# Altium PCB NUC972 DEV BOARD-2 20150128.PcbDoc (part 2 of 5)
Units mil, origin at the board's own origin, x right, y up, seen from the top; angles counter-clockwise.
Board outline 10236.22 x 7677.17 mil, 4 copper layers (Top, 2-GND, 3-POWER, Bottom), stack 35.4 mil thick; 572 components, 593 nets, 2369 pads, 1783 vias.
Unrouted connection lines stored in the file: 1277.
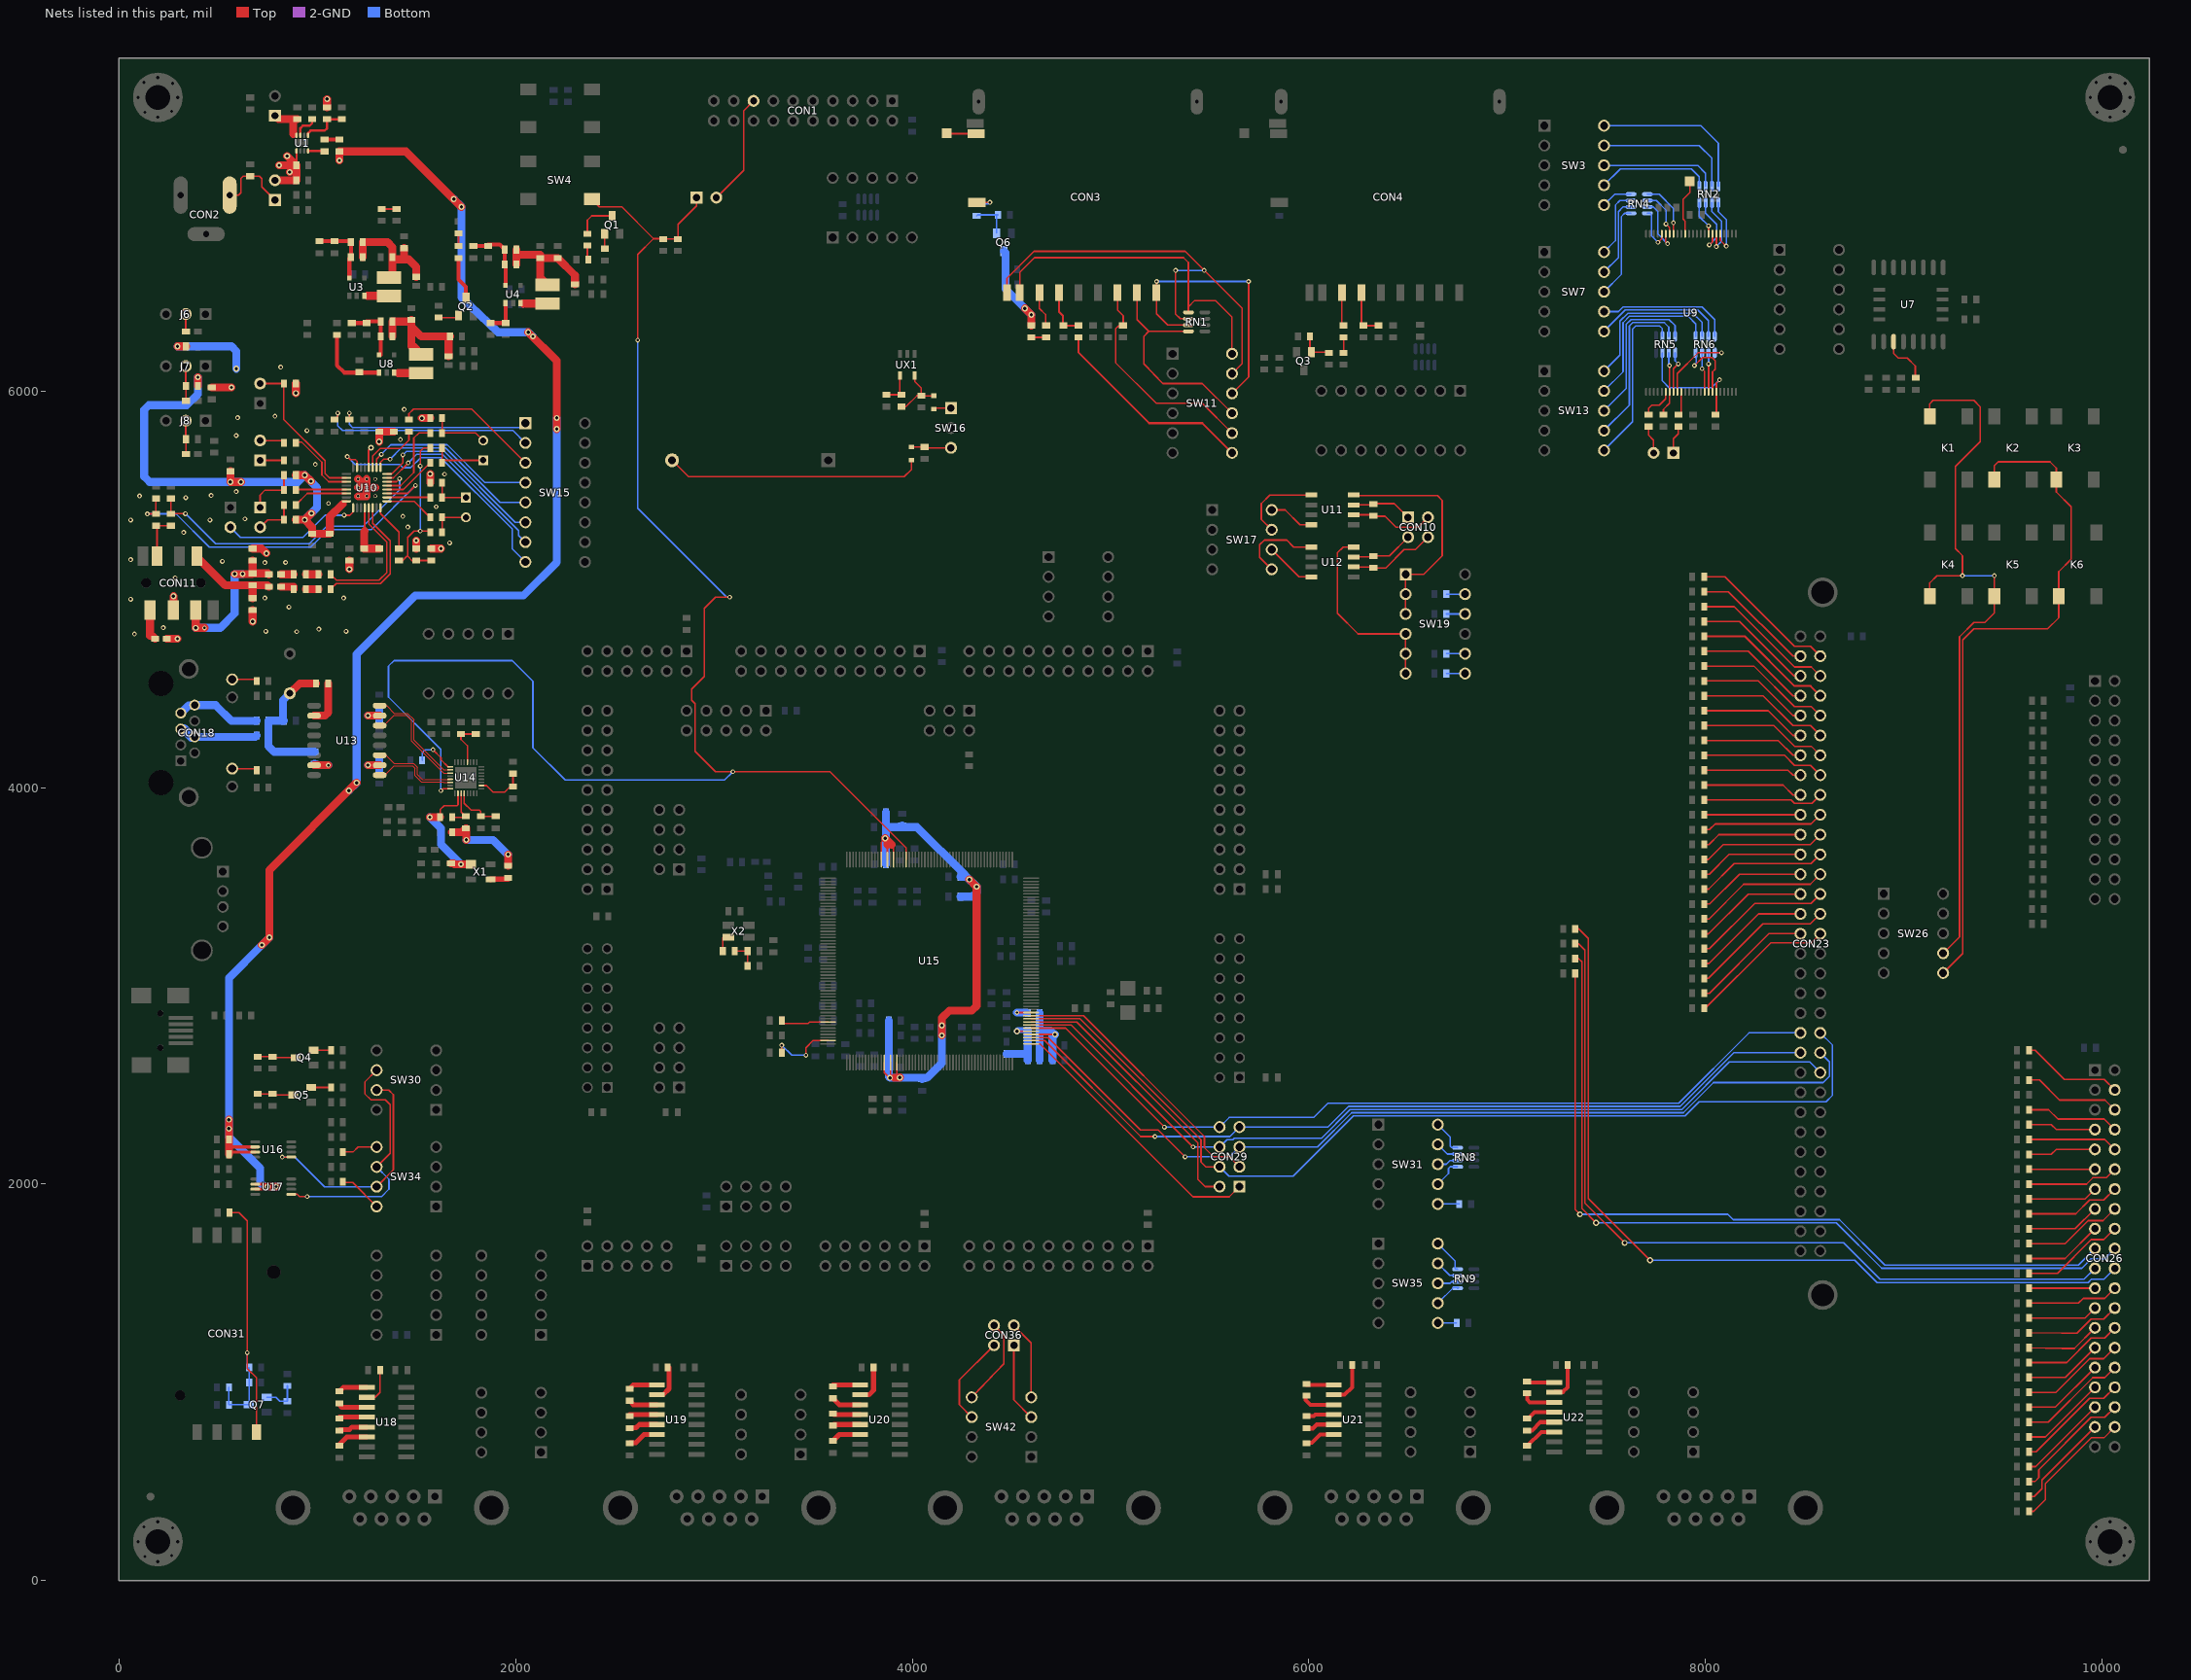
[diagram p4: the nets of this part, all layers, seen from the top]

## Via types
v1: diameter 24, hole 12, Top to Bottom, 1202 vias
v2: diameter 30, hole 16, Top to Bottom, 581 vias

## Nets (pads, with @x,y where several pads share a name; then routed paths per layer and width w, separated by ;. In a path a pad name is that pad's centre, name@x,y a point inside that pad or via, vN(x,y) a via of type N, cw(c..) or ccw(c..) an arc to the next point about the centre after c; other vN are vias at no path point)
5VIN: CT2.2 CT43.2 CT44.2 J3.2 R2.1 R5.2 R6.2 U1.1 U16.2 U16.3 U17.2 U17.3 | length 8518.7
  Top w10: CT2.2@895,7137.5 895.47,7137.97 U1.1@895.47,7210.63
  Top w15: CT44.2@555,2156.42 560.4,2161.82 U16.3@687.5,2161.82 ; 555,2180.85 561.56,2187.41 U16.2@687.5,2187.41 ; U17.3@687.5,1974.32 736.32,1974.32 v2(750,1988) 738.09,1999.91 U17.2@687.5,1999.91
  Top w40: CT44.2@555,2150.5 555,2156.42 555,2180.85 CT43.2@555,2225.5 v2(555,2280) v2(555,2325) ; v2(721,3206) v2(759,3244) 759,3584 v2(1199,4024) ; v2(750,1988) v2(793,1988) ; J3.2@787.5,7062.5 R6.2@895,7062.5 CT2.2@895,7137.5 ; v2(808,7137.5) CT2.2@895,7137.5 ; v2(848.5,7184) CT2.2@895,7137.5 ; v2(861.5,7104) CT2.2@895,7137.5 ; R2.1@1050,7430 v2(1050,7472) ; v2(1112.5,7162.5) R5.2@1112.5,7207.5 1448.5,7207.5 v2(1728,6928) ; v2(2064,6296) 2208,6152 v2(2208,5864) v2(2208,5808)
  Bottom w40: v2(759,3244) v2(721,3206) 555,3040 v2(555,2325) v2(555,2280) 555,2237 712,2080 712,2008 732,1988 v2(750,1988) v2(793,1988) ; v2(1160,3984) 1199,4023 v2(1199,4024) 1199,4672 1495,4968 2040,4968 2208,5136 v2(2208,5808) v2(2208,5864) ; v2(1689.11,6967.38) 1728,6928.5 v2(1728,6928) 1728,6472 1912,6296 v2(2064,6296) v2(2087.5,6275)
50MCLKI: C29.1 R72.2 U14.10 | length 275.5
  Top w8: U14.10@1828.24,4010.13 1853.87,4010.13 1888,3976 1944,3976 1973,4005 C29.1@1987.5,4005 ; C29.1@1987.5,4005 1987.5,4010.13 1999.5,4010.13 C29.1@1987.5,4005
  Top w10: C29.1@1987.5,4010.13 R72.2@1987.5,4070
ADC0: CON29.1 U15.55 | length 1391.7
  Top w8: U15.55@4599.31,2707.68 4644.32,2707.68 5416,1936 5598.5,1936 CON29.1@5650,1987.5
ADC1: CON29.2 U15.62 | length 1402.4
  Top w8: U15.62@4599.31,2817.91 4830.09,2817.91 5440,2208 5440,2024 5476.5,1987.5 CON29.2@5550,1987.5
ADC2: CON29.3 U15.64 | length 1399.1
  Top w8: U15.64@4599.31,2849.41 4864,2849.41 5473.41,2240 5473.41,2184 5519.91,2137.5 5600,2137.5 CON29.3@5650,2087.5
ADC3: CON23.42 CON29.4 U15.63 | length 4944.3
  Top w8: U15.63@4599.31,2833.66 4846.34,2833.66 5456,2224 5456,2112 5480.5,2087.5 CON29.4@5550,2087.5
  Bottom w8: CON29.4@5550,2087.5 5597.5,2040 5920,2040 6224,2344 7896,2344 7968,2416 8608,2416 8640,2448 8640,2700.75 CON23.42@8578.15,2762.6
ADC4: CON23.44 CON29.5 U15.57 | length 4579.9
  Top w8: U15.57@4599.31,2739.17 4684.83,2739.17 5150.42,2273.58 5239.92,2273.58 v1(5376,2137.5)
  Bottom w8: v1(5376,2137.5) 5600,2137.5 CON29.5@5650,2187.5 6043.5,2187.5 6216,2360 7888,2360 8040,2512 8592,2512 8624,2544 8624,2616.75 CON23.44@8578.15,2662.6
ADC5: CON23.46 CON29.6 U15.61 | length 4433.1
  Top w8: U15.61@4599.31,2802.17 4801.33,2802.17 v1(5416,2187.5)
  Bottom w8: v1(5416,2187.5) CON29.6@5550,2187.5 5586.5,2224 5616,2224 5624,2232 6064,2232 6208,2376 7880,2376 8120,2616 8524.75,2616 CON23.46@8578.15,2562.6
ADC6: CON23.43 CON29.7 U15.56 | length 4254.1
  Top w8: U15.56@4599.31,2723.43 4668.57,2723.43 5152,2240 v1(5224,2240)
  Bottom w8: v1(5224,2240) 5602.5,2240 CON29.7@5650,2287.5 6096,2287.5 6200.5,2392 7872,2392 8142.6,2662.6 CON23.43@8478.15,2662.6
ADC7: CON23.41 CON29.8 U15.60 | length 4282.3
  Top w8: U15.60@4599.31,2786.42 4773.08,2786.42 v1(5272,2287.5)
  Bottom w8: v1(5272,2287.5) CON29.8@5550,2287.5 5598.5,2336 6024,2336 6096,2408 7864,2408 8218.6,2762.6 CON23.41@8478.15,2762.6
ADCO: SW15.4 U10.10 | length 900.7
  Top w8: U10.10@1299.21,5614.86 1299.21,5656 v1(1323.21,5680)
  Bottom w8: v1(1323.21,5680) 1371.21,5728 1656,5728 1846.5,5537.5 SW15.4@2050,5537.5
ADD0: CON26.11 RB13.2 | length 332.5
  Top w8: RB13.2@9630,2075 CON26.11@9962.5,2075
ADD1: CON26.12 RB14.2 | length 463.6
  Top w8: RB14.2@9630,2000 9920,2000 9952,2032 10019.5,2032 CON26.12@10062.5,2075
ADD2: CON26.13 RB15.2 | length 353.2
  Top w8: RB15.2@9630,1925 9912.5,1925 CON26.13@9962.5,1975
ADD3: CON26.14 RB16.2 | length 484.3
  Top w8: RB16.2@9630,1850 9866,1850 9936,1920 10007.5,1920 CON26.14@10062.5,1975
ADD4: CON26.15 RB17.2 | length 373.9
  Top w8: RB17.2@9630,1775 9862.5,1775 CON26.15@9962.5,1875
ADD5: CON26.16 RB18.2 | length 505
  Top w8: RB18.2@9630,1700 9812,1700 9928,1816 10003.5,1816 CON26.16@10062.5,1875
ADD6: CON26.17 RB19.2 | length 394.6
  Top w8: RB19.2@9630,1625 9812.5,1625 CON26.17@9962.5,1775
ADD7: CON26.18 RB20.2 | length 525.7
  Top w8: RB20.2@9630,1550 9774,1550 9944,1720 10007.5,1720 CON26.18@10062.5,1775
ADD8: CON26.19 RB1.2 | length 3960.9
  Top w8: RB1.2@7342.5,3062.5 7342.5,1872 v2(7366.5,1848)
  Bottom w8: v2(7366.5,1848) 8112,1848 8139,1821 8675,1821 8904,1592 9879.5,1592 CON26.19@9962.5,1675
ADD9: CON26.20 RB2.2 | length 4136.8
  Top w8: RB2.2@7342.5,3137.5 7360,3137.5 7376,3121.5 7376,1877 v2(7448,1805)
  Bottom w8: v2(7448,1805) 8659,1805 8888,1576 9896,1576 9944,1624 10011.5,1624 CON26.20@10062.5,1675
AUXO1: C18.2 U10.21 | length 257.8
  Top w8: C18.2@892.5,5500 892.5,5502.66 U10.21@1147.64,5502.66
AUXO2: C20.2 U10.22 | length 279.1
  Top w8: C20.2@892.5,5425 950.47,5482.97 U10.22@1147.64,5482.97
AVD33: CB29.1 CB31.2 CT90.2 L14.2 U15.59 | length 385.9
  Top w8: v2(4528,2770.67) U15.59@4599.31,2770.67
  Bottom w30: v2(4528,2770.67) 4533.33,2776 4581.5,2776 CB29.1@4582.5,2775
  Bottom w40: L14.2@4475,2657.5 4582.5,2657.5 ; CB31.2@4582.5,2625 4582.5,2657.5 ; CB29.1@4582.5,2775 CT90.2@4582.5,2700 4582.5,2657.5
AVS: C67.1 CB29.2 CB31.1 CT90.1 RG2.2 RG3.2 U15.58 | length 578
  Top w8: U15.58@4599.31,2754.92 v2(4720,2754.92)
  Bottom w40: CB31.1@4642.5,2625 CT90.1@4642.5,2700 CB29.2@4642.5,2775 ; C67.1@4642.5,2862.5 CB29.2@4642.5,2775 ; RG3.2@4707.5,2625 RG2.2@4707.5,2700 4707.5,2742.42 v2@4718.04,2752.96 ; v2(4720,2754.92) v2@4718.04,2752.96 ; CB29.2@4642.5,2775 4696,2775 v2@4718.04,2752.96
BCLK: SW15.6 U10.8 | length 916.8
  Top w8: U10.8@1352.36,5581.4 1376,5581.4 1432,5637.4 v1(1432,5677)
  Bottom w8: v1(1432,5677) 1451,5696 1640,5696 1998.5,5337.5 SW15.6@2050,5337.5
BLEN: CON23.4 RL18.2 | length 751.3
  Top w8: RL18.2@7992.5,5062.5 8097.5,5062.5 8448,4712 8528.75,4712 CON23.4@8578.15,4662.6
CAN0H: CON10.1 R54.1 U11.7 | length 309.5
  Top w8: U11.7@6225.1,5425 6325,5425 R54.1@6325,5430 6327,5432 6430.5,5432 CON10.1@6500,5362.5
CAN0L: CON10.2 R54.2 U11.6 | length 436.3
  Top w8: U11.6@6225.1,5375 6323.24,5375 6323.24,5363.36 6323.34,5363.36 R54.2@6325,5370 6327,5368 6384,5368 6439.5,5312.5 6550,5312.5 CON10.2@6600,5362.5
CAN0RS: SW19.1 SW19.2 SW19.3 U11.8 | length 1161.1
  Top w8: U11.8@6225.1,5475 6228.1,5472 6648,5472 6672,5448 6672,5168 6579,5075 SW19.1@6487.5,5075 SW19.2@6487.5,4975 SW19.3@6487.5,4875
CAN0RX: SW17.8 U11.4 | length 231.1
  Top w8: SW17.8@5812.5,5400 5880,5400 5955,5325 U11.4@6012.5,5325
CAN0TX: SW17.7 U11.1 | length 424.1
  Top w8: SW17.7@5812.5,5300 5760,5352.5 5760,5432 5803,5475 U11.1@6012.5,5475
CAN1H: CON10.3 R59.1 U12.7 | length 319.3
  Top w8: U12.7@6225.1,5162.5 6325,5162.5 R59.1@6325,5167.5 6325.5,5168 6405.5,5168 CON10.3@6500,5262.5
CAN1L: CON10.4 R59.2 U12.6 | length 444.1
  Top w8: U12.6@6225.1,5112.5 6325,5112.5 R59.2@6325,5107.5 6387.5,5107.5 6480,5200 6537.5,5200 CON10.4@6600,5262.5
CAN1RS: SW19.4 SW19.5 SW19.6 U12.8 | length 984.5
  Top w8: U12.8@6225.1,5212.5 6172.5,5212.5 6144,5184 6144,4879 6248,4775 SW19.4@6487.5,4775 SW19.5@6487.5,4675 SW19.6@6487.5,4575
CAN1RX: SW17.6 U12.4 | length 257
  Top w8: SW17.6@5812.5,5200 5950,5062.5 U12.4@6012.5,5062.5
CAN1TX: SW17.5 U12.1 | length 434.2
  Top w8: SW17.5@5812.5,5100 5752,5160.5 5752,5224 5776,5248 5888,5248 5923.5,5212.5 U12.1@6012.5,5212.5
CDAVS: CT21.1 CT25.1 CT26.1 CT27.1 R47.1 R53.1 U10.24 | length 2552.5
  Top w10: 1128,5429 1128,5443.6 U10.24@1147.64,5443.6
  Top w40: CT21.1@398.75,6025 v2(398.75,6068.75) ; CT25.1@562.5,5595 v2(562.5,5541) v2(616,5541) ; R53.1@892.5,5350 v2(937.5,5350) ; R47.1@892.5,5575 v2(937.5,5575) 938,5575 v2(969,5544) ; v2(971,5383) 938,5350 v2(937.5,5350) ; 1128,5429 1064,5365 1064,5281.5 CT27.1@1062.5,5280 CT26.1@975,5280 975,5312.5 v2(937.5,5350)
  Bottom w40: v2(398.75,6068.75) 398.75,5984 342.75,5928 152,5928 128,5904 128,5568 155,5541 v2(562.5,5541) v2(616,5541) 904,5541 v2(937.5,5575) 1000,5512.5 1000,5412.5 v2(937.5,5350)
CDCAVS: R56.1 R57.1 U10.28 | length 281.2
  Top w10: 1240.16,5293 U10.28@1240.16,5410.14
  Top w40: 1240.16,5293 1237.5,5290.34 R56.1@1237.5,5205 R57.1@1312.5,5205
CDCVS: C22.1 C23.1 C27.1 CB8.1 CON11.2 CT16.1 CT22.1 CT28.1 L10.1 R33.1 R36.1 R43.1 R44.1 R48.2 U10.12 U10.33 U10.34 U10.35 U10.36 U10.37 U10.38 U10.39 U10.40 U10.41 | length 1658.2
  Top w10: U10.12@1259.84,5614.86 1259.84,5701 v2(1272,5713.16)
  Top w40: L10.1@242.5,4750 v2(296,4750) ; CON11.2@275.59,4895.37 v2(275.59,4965) ; v2(296,6225) CT16.1@338.75,6225 ; CT22.1@468.75,6017.5 v2(568,6017.5) ; v2(675,4837) C27.1@675,4895 ; C22.1@675,5205 720,5205 v2(744,5181) ; v2(892.5,5989) R33.1@892.5,6037.5 ; v2(1162.5,5101) C23.1@1162.5,5145 ; U10.35@1206.69,5469.19 U10.34@1250,5469.19 U10.37@1250,5512.5 ; U10.36@1206.69,5512.5 U10.37@1250,5512.5 ; U10.41@1206.69,5555.81 U10.37@1250,5512.5 ; U10.40@1250,5555.81 U10.37@1250,5512.5 ; U10.38@1293.31,5512.5 U10.37@1250,5512.5 ; v2(1312.5,5744) R43.1@1312.5,5795 R44.1@1387.5,5795 ; CB8.1@1500,5205 v2(1500,5245) ; v2(1528,5862.5) R36.1@1570,5862.5 ; R48.2@1570,5537.5 v2(1570,5581) ; CT28.1@1575,5205 v2(1624,5205)
  2-GND w20: U10.34@1250,5469.19 U10.37@1250,5512.5 U10.40@1250,5555.81
  Bottom w40: v2(296,6225) 568,6225 593,6200 v2(593,6112)
  other v1: 79.16,4774.43 897.2,4785.79 1145.69,4787.39 741.74,4787.7 1008.74,4799.06 224.02,4805.67 858.2,4909.84 59.76,4948.95 1133.71,4955.28 736.82,4955.65 284.43,5057.54 736.82,5134.75 840.39,5135.16 522.26,5140.84 59.76,5148.95 1667.71,5233.64 326.92,5286.17 1457.52,5313.17 59.76,5348.95 459.76,5348.95 635.96,5354.53 1431.96,5367.14 1600,5416 1057,5432.89 337.64,5461.8 104.73,5470.32 465.46,5473.16 591.62,5492.66 1642.15,5580.17 990.92,5629.92 1420,5755 592.05,5774.82 948.45,5800.15 599.28,5865.28 787.44,5872.52 1438.74,5906.78 816.38,6120.37
COL: R76.1 R77.2 U14.4 | length 250.1
  Top w8: U14.4@1741.63,3970.76 1741.63,3920 1776.13,3885.5 1818.5,3885.5 1824,3880 1824,3856 R76.1@1825,3855 R77.2@1900,3855
COL0: K1.2 K4.1 K5.1 SW26.7 | length 3705.2
  Top w8: K4.1@9130.31,4965.16 9130.31,5032 9166.31,5068 v1(9295,5068) 9295,5169 9259,5205 9259,5619 9384,5744 9384,5920 9352,5952 9146.31,5952 9130.31,5936 K1.2@9130.31,5872.34 ; SW26.7@9197.64,3164.57 9280,3246.93 9280,4760 9352,4832 9407.31,4832 9455.31,4880 K5.1@9455.31,4965.16 v1(9455.31,5068)
  Bottom w8: v1(9295,5068) v1(9455.31,5068)
COL1: K2.1 K3.1 K6.1 SW26.6 | length 3466.6
  Top w8: SW26.6@9197.64,3064.57 9296,3162.93 9296,4744 9352,4800 9724.31,4800 9780.31,4856 K6.1@9780.31,4965.16 9780.31,5088.42 9843,5151.1 9843,5415.32 9767.81,5490.5 K3.1@9767.81,5552.66 9767.81,5610.5 9735.81,5642.5 9475,5642.5 9455.31,5622.82 K2.1@9455.31,5552.66
CRS: R67.1 R68.2 U14.20 | length 230.2
  Top w8: U14.20@1757.37,4128.24 1757.37,4210.63 1725,4243 R67.1@1725,4270 R68.2@1800,4270
CSB: SW15.8 U10.15 | length 1308.1
  Top w8: v1(1152,5669) 1168,5653 1192.79,5653 1200.79,5645 U10.15@1200.79,5614.86
  Bottom w8: v1(1152,5669) 1192,5629 1416,5629 1432,5613 1472,5613 1523,5664 1624,5664 1984,5304 1984,5203.5 SW15.8@2050,5137.5
D0: CON26.23 RB21.2 | length 332.5
  Top w8: RB21.2@9630,1475 CON26.23@9962.5,1475
D1: CON26.24 RB22.2 | length 463.6
  Top w8: RB22.2@9630,1400 9880,1400 9904,1424 10011.5,1424 CON26.24@10062.5,1475
D2: CON26.25 RB23.2 | length 353.2
  Top w8: RB23.2@9630,1325 9912.5,1325 CON26.25@9962.5,1375
D3: CON26.26 RB24.2 | length 485.1
  Top w8: RB24.2@9630,1250 9794.5,1248 9872,1248 9944,1320 10007.5,1320 CON26.26@10062.5,1375
D4: CON26.27 RB25.2 | length 375.6
  Top w8: RB25.2@9630,1175 9796.5,1171 9858.5,1171 CON26.27@9962.5,1275
D5: CON26.28 RB26.2 | length 505
  Top w8: RB26.2@9630,1100 9820,1100 9944,1224 10011.5,1224 CON26.28@10062.5,1275
D6: CON26.29 RB27.2 | length 394.5
  Top w8: RB27.2@9630,1025 9631.79,1025.29 9812.79,1025.29 CON26.29@9962.5,1175
D7: CON26.30 RB28.2 | length 525.7
  Top w8: RB28.2@9630,950 9766,950 9936,1120 10007.5,1120 CON26.30@10062.5,1175
D8: CON26.31 RB29.2 | length 415.3
  Top w8: RB29.2@9630,875 9762.5,875 CON26.31@9962.5,1075
D9: CON26.32 RB30.2 | length 546.4
  Top w8: RB30.2@9630,800 9728,800 9952,1024 10011.5,1024 CON26.32@10062.5,1075
D10: CON26.33 RB31.2 | length 436.1
  Top w8: RB31.2@9630,725 9712.5,725 CON26.33@9962.5,975
D11: CON26.34 RB32.2 | length 567
  Top w8: RB32.2@9630,650 9631.58,650.52 9666.52,650.52 9936,920 10007.5,920 CON26.34@10062.5,975
D12: CON26.35 RB33.2 | length 456.6
  Top w8: RB33.2@9630,575 9632.15,575.8 9663.33,575.83 CON26.35@9962.5,875
D13: CON26.36 RB34.2 | length 611.3
  Top w8: RB34.2@9630,500 9660,500 9680,520 9680,560 9944,824 10011.5,824 CON26.36@10062.5,875
D14: CON26.37 RB35.2 | length 503.5
  Top w8: RB35.2@9630,425 9657,425 9696,464 9696,508.5 CON26.37@9962.5,775
D15: CON26.38 RB36.2 | length 655.7
  Top w8: RB36.2@9630,350 9654,350 9712,408 9712,488.5 9944,720.5 10008,720.5 CON26.38@10062.5,775
DAC0: R61.1 U10.30 | length 702.2
  Top w8: R61.1@1067.5,5000 1096.5,5029 1320,5029 1368,5077 1368,5244.53 1279.53,5333 U10.30@1279.53,5410.14
DAC1: R60.1 U10.29 | length 676.8
  Top w8: R60.1@1067.5,5075 1097.5,5045 1312,5045 1352,5085 1352,5237 1259.84,5329.16 U10.29@1259.84,5410.14
DACI: SW15.5 U10.9 | length 899.8
  Top w8: U10.9@1318.9,5614.86 1318.9,5640 1334.9,5656 v1(1368,5656)
  Bottom w8: v1(1368,5656) 1424,5712 1648,5712 1922.5,5437.5 SW15.5@2050,5437.5
EMCLK: R25.2 SW11.7 | length 1060.5
  Top w10: R25.2@4837.5,6270 4837.5,6194.5 5194.5,5837.5 5462.5,5837.5 SW11.7@5612.5,5687.5
EMCMD: CON3.2 R26.1 SW11.8 | length 1128.2
  Top w8: CON3.2@5034.74,6496.16 5034.74,6408 5064,6378.74 5064,6331.5 R26.1@5062.5,6330 5060.5,6328 5040,6328 5025,6313 5025,6143 5230.5,5937.5 5462.5,5937.5 SW11.8@5612.5,5787.5
EMD0: CON3.7 RN1.2 SW11.12 | length 1697.3
  Top w8: CON3.7@4542.62,6496.16 4542.62,6598.62 4616,6672 5368,6672 5392,6648 5392,6424 ; RN1.2@5393,6396 5392,6397 5392,6424 ; SW11.12@5612.5,6187.5 5612.5,6371.5 5528,6456 5424,6456 5392,6424
EMD1: CON3.8 RN1.4 SW11.11 | length 2222.6
  Top w8: CON3.8@4477.66,6496.16 4477.66,6568 4613.66,6704 5376,6704 v1(5472,6608) 5664,6416 5664,6139 SW11.11@5612.5,6087.5 ; v1(5328,6608) 5328,6388 5352,6364 RN1.4@5393,6364
  Bottom w8: v1(5328,6608) v1(5472,6608)
EMD2: CON3.9 RN1.6 SW11.10 | length 1411.6
  Top w8: v1(5232,6552) 5232,6496.57 CON3.9@5231.59,6496.16 5231.59,6388.41 5288,6332 RN1.6@5393,6332 ; SW11.10@5612.5,5987.5 5696,6071 v1(5696,6552)
  Bottom w8: v1(5232,6552) v1(5696,6552)
EMD3: CON3.1 RN1.8 SW11.9 | length 1143.5
  Top w8: CON3.1@5133.17,6496.16 5133.17,6359.5 5192.67,6300 ; RN1.8@5393,6300 5192.67,6300 ; SW11.9@5612.5,5887.5 5462.5,6037.5 5264,6037.5 5168,6136 5168,6275.33 5192.67,6300
EMVD33: CT55.2 Q6.D R24.1 R100.2 | length 476.9
  Top w40: v2(4568,6416) v2(4600,6384) R24.1@4600,6330
  Bottom w40: Q6.D@4462.5,6704.72 4470,6697.22 CT55.2@4470,6612.5 R100.2@4470,6537.5 4470,6514 v2(4568,6416) v2(4600,6384)
EMWP: CON3.11 PAD1.\ | length 148
  Top w8: PAD1.\@4175,7300 4177.66,7297.34 CON3.11@4321.95,7297.34
ETHX0: R74.1 R75.1 U14.3 | length 195.5
  Top w8: R74.1@1680,3850 1738,3850 R75.1@1745.44,3857.44 ; U14.3@1725.88,3970.76 1725.88,3877 R75.1@1745.44,3857.44 ; R75.1@1750,3855 1747.88,3855 R75.1@1745.44,3857.44
ETHX1: C31.1 R74.2 U14.2 X1.1 | length 654
  Top w8: R74.2@1620,3850 1620,3888 1639.81,3907.81 1705.44,3907.81 1710.13,3912.5 U14.2@1710.13,3970.76
  Top w40: v2(1568,3850) R74.2@1620,3850 ; C31.1@1674.5,3617 1687.5,3617 1692,3612.5 v2(1725,3612.5) X1.1@1775,3612.5
  Bottom w40: v2(1568,3850) 1569,3850 1625,3794 1625,3712.5 v2(1725,3612.5)
FS: SW15.7 U10.7 | length 944.3
  Top w8: U10.7@1352.36,5561.71 1384,5561.71 v1(1459.29,5637)
  Bottom w8: v1(1459.29,5637) 1502.29,5680 1632,5680 2016,5296 2016,5271.5 SW15.7@2050,5237.5
ICENRST: CON1.15 J4.2 | length 565.2
  Top w8: J4.2@3012.5,6975 3150,7112.5 3150,7412.5 CON1.15@3200,7462.5
LAUXI: C14.2 U10.19 | length 376.5
  Top w8: C14.2@892.5,5737.5 896,5741 923,5741 1024,5640 1024,5576 1057.97,5542.03 U10.19@1147.64,5542.03
LCLK: CON23.8 RL19.2 | length 709.9
  Top w10: RL19.2@7992.5,4762.5 8197.5,4762.5 8448,4512 8528.75,4512 CON23.8@8578.15,4462.6
LCS: CON23.3 RL17.2 | length 620.2
  Top w8: RL17.2@7992.5,4987.5 8115.1,4987.5 8440,4662.6 CON23.3@8478.15,4662.6
LD0: CON23.32 RL1.2 | length 741
  Top w8: RL1.2@7992.5,2887.5 7993,2888 8000,2888 8328,3216 8531.55,3216 CON23.32@8578.15,3262.6
LD1: CON23.31 RL2.2 | length 610
  Top w8: RL2.2@7992.5,2962.5 8018.5,2962.5 8318.6,3262.6 CON23.31@8478.15,3262.6
LD2: CON23.30 RL3.2 | length 720.3
  Top w8: RL3.2@7992.5,3037.5 8013.5,3037.5 8288.45,3312.45 8528,3312.45 CON23.30@8578.15,3362.6
LD3: CON23.29 RL4.2 | length 589.2
  Top w8: RL4.2@7992.5,3112.5 8016.5,3112.5 8266.6,3362.6 CON23.29@8478.15,3362.6
LD4: CON23.28 RL5.2 | length 699.6
  Top w8: RL5.2@7992.5,3187.5 8019.5,3187.5 8248,3416 8531.55,3416 CON23.28@8578.15,3462.6
LD5: CON23.27 RL6.2 | length 568.5
  Top w8: RL6.2@7992.5,3262.5 8014.5,3262.5 8214.6,3462.6 CON23.27@8478.15,3462.6
LD6: CON23.26 RL7.2 | length 678.9
  Top w8: RL7.2@7992.5,3337.5 8017.5,3337.5 8192,3512 8527.55,3512 CON23.26@8578.15,3562.6
LD7: CON23.25 RL8.2 | length 547.8
  Top w8: RL8.2@7992.5,3412.5 8020.5,3412.5 8170.6,3562.6 CON23.25@8478.15,3562.6
LD8: CON23.24 RL9.2 | length 658.2
  Top w8: RL9.2@7992.5,3487.5 8015.5,3487.5 8144,3616 8531.55,3616 CON23.24@8578.15,3662.6
LD9: CON23.23 RL10.2 | length 527.1
  Top w8: RL10.2@7992.5,3562.5 8018.5,3562.5 8118.6,3662.6 CON23.23@8478.15,3662.6
LD10: CON23.22 RL11.2 | length 637.5
  Top w8: RL11.2@7992.5,3637.5 8013.5,3637.5 8088.45,3712.45 8528,3712.45 CON23.22@8578.15,3762.6
LD11: CON23.21 RL12.2 | length 506.4
  Top w8: RL12.2@7992.5,3712.5 8016.5,3712.5 8066.6,3762.6 CON23.21@8478.15,3762.6
LD12: CON23.20 RL13.2 | length 616.8
  Top w8: RL13.2@7992.5,3787.5 8019.5,3787.5 8048,3816 8531.55,3816 CON23.20@8578.15,3862.6
LD13: CON23.19 RL14.2 | length 485.8
  Top w8: RL14.2@7992.5,3862.5 7992.5,3862.6 CON23.19@8478.15,3862.6
LD14: CON23.18 RL15.2 | length 610.5
  Top w8: RL15.2@7992.5,3937.5 8430.5,3937.5 8448,3920 8535.55,3920 CON23.18@8578.15,3962.6
LD15: CON23.17 RL16.2 | length 506.3
  Top w8: RL16.2@7992.5,4012.5 8390.1,4012.5 8440,3962.6 CON23.17@8478.15,3962.6
LD16: CON23.16 RL23.2 | length 627
  Top w8: RL23.2@7992.5,4162.5 8397.5,4162.5 8448,4112 8528.75,4112 CON23.16@8578.15,4062.6
LD17: CON23.15 RL24.2 | length 496
  Top w8: RL24.2@7992.5,4087.5 8415.1,4087.5 8440,4062.6 CON23.15@8478.15,4062.6
LD18: CON23.14 RL25.2 | length 647.7
  Top w8: RL25.2@7992.5,4312.5 7993,4312 8344,4312 8448,4208 8532.75,4208 CON23.14@8578.15,4162.6
LD19: CON23.13 RL26.2 | length 516.7
  Top w8: RL26.2@7992.5,4237.5 8365.1,4237.5 8440,4162.6 CON23.13@8478.15,4162.6
LD20: CON23.12 RL27.2 | length 668.5
  Top w8: RL27.2@7992.5,4462.5 8289.5,4462.5 8440,4312 8528.75,4312 CON23.12@8578.15,4262.6
LD21: CON23.11 RL28.2 | length 537.4
  Top w8: RL28.2@7992.5,4387.5 8315.1,4387.5 8440,4262.6 CON23.11@8478.15,4262.6
LD22: CON23.10 RL29.2 | length 689.2
  Top w8: RL29.2@7992.5,4612.5 8243.5,4612.5 8448,4408 8532.75,4408 CON23.10@8578.15,4362.6
LD23: CON23.9 RL30.2 | length 558.1
  Top w8: RL30.2@7992.5,4537.5 8265.1,4537.5 8440,4362.6 CON23.9@8478.15,4362.6
LDEN: CON23.5 RL22.2 | length 599.5
  Top w8: RL22.2@7992.5,4837.5 8170.5,4837.5 8445.4,4562.6 CON23.5@8478.15,4562.6
LHSYNC: CON23.7 RL20.2 | length 578.8
  Top w8: RL20.2@7992.5,4687.5 8215.1,4687.5 8440,4462.6 CON23.7@8478.15,4462.6
LIN0: R49.2 R51.2 U10.3 | length 1831.2
  Top w8: v1(144,5380) R51.2@187.5,5380 R49.2@187.5,5457.5 ; U10.3@1352.36,5482.97 1456,5482.97 v1(1496,5522.97)
  Bottom w8: v1(144,5380) 288,5380 288.5,5380.5 456,5213 968,5213 1056,5301 1274.03,5301 v1(1496,5522.97)
LIN1: R50.2 R52.2 U10.6 | length 1532.9
  Top w8: R50.2@262.5,5457.5 R52.2@262.5,5380 263.5,5381 v1(336,5381) ; U10.6@1352.36,5542.03 1401.03,5542.03 v1(1416,5557)
  Bottom w8: v1(336,5381) 488,5229 960,5229 1048,5317 1232,5317 1416,5501 v1(1416,5557)
LSPKOUT: CON8.2 U10.25 | length 714.1
  Top w8: v1(1136,5373) 1165.1,5373 1181.1,5389 U10.25@1181.1,5410.14
  Bottom w8: CON8.2@562.5,5312.5 614,5261 928,5261 1040,5373 v1(1136,5373)
LVSYNC: CON23.6 RL21.2 | length 730.6
  Top w8: RL21.2@7992.5,4912.5 7993,4912 8144,4912 8448,4608 8532.75,4608 CON23.6@8578.15,4562.6
MCLK: R45.2 U10.11 | length 316
  Top w8: U10.11@1279.53,5614.86 1279.53,5671.53 1318.5,5710.5 1421,5710.5 1462.5,5752 R45.2@1462.5,5795
MDI_RN: U13.8 U14.26 | length 549
  Top w4: U13.8@1315.5,4412.5 1350,4412.5 1387.5,4375 1454.47,4375 1487.5,4341.97 1487.5,4240.09 1638.72,4088.87 U14.26@1670.76,4088.87
MDI_RP: U13.6 U14.27 | length 555.9
  Top w4: U13.6@1315.5,4312.5 1337,4312.5 1387.5,4363 1449.5,4363 1475.5,4337 1475.5,4235.12 1637.5,4073.12 U14.27@1670.76,4073.12
MDI_TN: U13.3 U14.29 | length 428.8
  Top w4: U13.3@1315.5,4162.5 1346.47,4162.5 1387.5,4121.47 1487.02,4121.47 1506,4102.49 1506,4064.99 1531.23,4039.75 1635.63,4039.75 1637.5,4041.63 U14.29@1670.76,4041.63
MDI_TP: U13.1 U14.30 | length 431.3
  Top w4: U13.1@1315.5,4062.5 1340.53,4062.5 1387.5,4109.47 1482.05,4109.47 1494,4097.51 1494,4060.01 1526.26,4027.75 1635.63,4027.75 1637.5,4025.88 U14.30@1670.76,4025.88
MIC00: C19.1 U10.2 | length 218
  Top w8: U10.2@1352.36,5463.29 1569.21,5463.29 C19.1@1570,5462.5
MIC01: C21.1 U10.1 | length 251.2
  Top w8: U10.1@1352.36,5443.6 1488.9,5443.6 C21.1@1570,5362.5
MIC10: C15.1 U10.5 | length 429.4
  Top w8: U10.5@1352.36,5522.34 1421.34,5522.34 1487.5,5588.5 1487.5,5762.5 1512.5,5787.5 C15.1@1570,5787.5
MIC11: C17.1 U10.4 | length 273.5
  Top w8: U10.4@1352.36,5502.66 1435.16,5502.66 C17.1@1570,5637.5
MICBIAS: CB8.2 CT28.2 R46.2 R55.2 R58.2 | length 868
  Top w8: R58.2@1412.5,5145 1432.08,5145 1452.08,5165 1456,5165 ; v1(1520,5621) 1520,5696.5 1536,5712.5 R46.2@1570,5712.5 ; R55.2@1570,5287.5 1570,5293 v1(1520,5293) 1488,5293 1456,5261 1456,5165 ; CT28.2@1575,5145 CB8.2@1500,5145 1477.41,5145 1457.41,5165 1456,5165
  Bottom w8: v1(1520,5293) v1(1520,5621)
MODE: CON5.2 R33.2 U10.18 | length 776.7
  Top w8: CON5.2@712.5,6037.5 R33.2@832.5,6037.5 832,6037 832,5856 1040,5648 1040,5584 1062.29,5561.71 U10.18@1147.64,5561.71
MVS: CM1.2 CM2.2 CM3.2 CM4.2 CM5.2 CM6.2 CT67.2 CT93.2 R109.1 R110.1 R111.1 R117.1 U15.13 U15.15 U15.17 U15.147 U15.149 U15.151 | length 3369.4
  Top w8: U15.151@3843.41,3636.81 3843.41,3723.41 v2(3864,3744) ; U15.13@3859.15,2613.19 3859.15,2562.5 3884.15,2537.5 v2(3888,2536) ; U15.149@3874.9,3636.81 3874.9,3712 ; U15.15@3890.65,2613.19 3890.65,2544 3890.57,2543.92 3890.57,2536.45 v2(3888,2536) ; 3896,3712 3896,3710.4 3906.4,3700 U15.147@3906.4,3636.81 ; U15.17@3922.15,2613.19 3922.15,2549.6 3908.55,2536 v2(3888,2536)
  Top w40: v2(3864,3744) 3874.9,3733.1 ; 3874.9,3712 3874.9,3733.1 ; 3896,3712 3874.9,3733.1 ; 3908.55,2536 3936,2536 v2(3937.5,2537.5) ; v2(4150,2750) v2(4150,2800) 4150,2837.5 4187.5,2875 4300,2875 4325,2900 v2(4325,3500) 4324,3500 v2(4288,3536)
  Bottom w40: v2(3864,3744) v2@3864.89,3745.52 ; CM3.2@3867.5,3612.5 CM2.2@3867.5,3687.5 3867.5,3742.91 v2@3864.89,3745.52 ; CM1.2@3867.5,3875 CT67.2@3867.5,3800 ; CM4.2@3882.5,2825 CM5.2@3882.5,2750 CT93.2@3882.5,2662.5 CM6.2@3882.5,2587.5 3882.5,2541.5 v2(3888,2536) R117.1@4056,2536 ; R109.1@3950,3807.5 R109.1@3950,3800 ; R117.1@4050,2530 R117.1@4056,2536 ; v2(4150,2800) v2(4150,2750) 4150,2611 4075,2536 R117.1@4056,2536 ; R111.1@4242.5,3450 4304,3450 4325,3471 v2(4325,3500) 4275,3550 ; R110.1@4242.5,3550 4275,3550 ; v2@3864.89,3745.52 3867.5,3750 CT67.2@3867.5,3800 ; CT67.2@3867.5,3800 R109.1@3950,3800 ; R109.1@3950,3800 4025,3800 4258.75,3566.25 4275,3550
N01892: CON36.1 SW42.3 | length 398.7
  Top w8: CON36.1@4512.5,1187.5 4512.5,912.5 SW42.3@4600,825
N01896: CON36.3 SW42.4 | length 398.7
  Top w8: CON36.3@4512.5,1287.5 4600,1200 SW42.4@4600,925
N01916: CON36.2 SW42.6 | length 460.9
  Top w8: SW42.6@4300,825 4237.5,887.5 4237.5,1012.5 CON36.2@4412.5,1187.5
N01928: CON36.4 SW42.5 | length 448.8
  Top w8: SW42.5@4300,925 4425,1056 4462.5,1093.5 4462.5,1237.5 CON36.4@4412.5,1287.5
N02492: C52.1 U19.5 | length 144.7
  Top w25: C52.1@2575,770 2576.5,771.5 2608,771.5 2624,787.5 U19.5@2712.5,787.5
N02496: C47.1 U19.3 | length 147.5
  Top w25: C47.1@2575,907.5 2592,890.5 2592,887.5 U19.3@2712.5,887.5
N02500: C47.2 U19.1 | length 147.5
  Top w25: C47.2@2575,967.5 2592,984.5 2592,987.5 U19.1@2712.5,987.5
N02504: C52.2 U19.4 | length 145
  Top w25: C52.2@2575,830 2575,837.5 U19.4@2712.5,837.5
N02534: C38.1 U19.2 | length 188.6
  Top w25: U19.2@2712.5,937.5 2744,937.5 2774.5,968 2774.5,1075 C38.1@2767.5,1075
N02546: C57.2 U19.6 | length 156.1
  Top w25: C57.2@2575,692.5 2578.5,696 2606.5,696 2648,737.5 U19.6@2712.5,737.5
N02580: C54.1 U21.5 | length 146.4
  Top w20: C54.1@5987.5,770 5989.5,768 6020.5,768 6040,787.5 U21.5@6125,787.5
N02584: C49.1 U21.3 | length 173.4
  Top w20: C49.1@5987.5,932.5 5984,929 5984,911.5 6008,887.5 U21.3@6125,887.5
N02588: C49.2 U21.1 | length 142.5
  Top w20: C49.2@5987.5,992.5 5987.5,987.5 U21.1@6125,987.5
N02592: C54.2 U21.4 | length 141
  Top w20: C54.2@5987.5,830 5988,829.5 6024,829.5 6032,837.5 U21.4@6125,837.5
N02616: C42.1 U21.2 | length 220.5
  Top w20: U21.2@6125,937.5 6180,937.5 6217.5,975 C42.1@6217.5,1087.5
N02708: C59.2 U21.6 | length 156.1
  Top w20: C59.2@5987.5,692.5 5991,696 6014.5,696 6056,737.5 U21.6@6125,737.5
N03132: C55.1 U22.5 | length 155.1
  Top w20: C55.1@7100,757.5 7125.5,757.5 7168,800 U22.5@7237.5,800
N03136: C50.1 U22.3 | length 174.3
  Top w20: C50.1@7100,945 7100,914 7114,900 U22.3@7237.5,900
N03140: C50.2 U22.1 | length 139.6
  Top w20: C50.2@7100,1005 7105,1000 U22.1@7237.5,1000
N03144: C55.2 U22.4 | length 151
  Top w20: C55.2@7100,817.5 7105,817.5 7137.5,850 U22.4@7237.5,850
N03174: C44.1 U22.2 | length 189.8
  Top w20: U22.2@7237.5,950 7239.5,952 7281,952 7305,976 C44.1@7305,1087.5
N03186: C60.2 U22.6 | length 166.5
  Top w20: C60.2@7100,680 7101.5,680 7171.5,750 U22.6@7237.5,750
N03296: C51.1 U18.5 | length 144.7
  Top w25: C51.1@1112.5,757.5 1117.5,762.5 1162.5,762.5 1175,775 U18.5@1250,775
N03300: C46.1 U18.3 | length 150.2
  Top w25: C46.1@1112.5,895 1112.5,887.5 1125,875 U18.3@1250,875
N03304: C46.2 U18.1 | length 145.8
  Top w25: C46.2@1112.5,955 1132.5,975 U18.1@1250,975
N03338: C51.2 U18.4 | length 145
  Top w25: C51.2@1112.5,817.5 1112.5,825 U18.4@1250,825
N03398: C36.1 U18.2 | length 190.4
  Top w8: U18.2@1250,925 1292.5,925 1317.5,950 C36.1@1317.5,1062.5
N03410: C56.2 U18.6 | length 160.5
  Top w25: C56.2@1112.5,680 1112.5,687.5 1150,725 U18.6@1250,725
N03932: C53.1 U20.5 | length 139.6
  Top w25: C53.1@3600,782.5 3605,787.5 U20.5@3737.5,787.5
N03936: C48.1 U20.3 | length 151.3
  Top w25: C48.1@3600,920 3632,888 3632,887.5 U20.3@3737.5,887.5
N03940: C48.2 U20.1 | length 145
  Top w25: C48.2@3600,980 3600,987.5 U20.1@3737.5,987.5
N03944: C53.2 U20.4 | length 139.6
  Top w25: C53.2@3600,842.5 3605,837.5 U20.4@3737.5,837.5
N03976: C40.1 U20.2 | length 191.8
  Top w25: U20.2@3737.5,937.5 3782.5,937.5 3805,960 C40.1@3805,1075
N03988: C58.2 U20.6 | length 151.3
  Top w25: C58.2@3600,705 3632,737 3632,737.5 U20.6@3737.5,737.5
N16062858: SW30.6 SW34.6 U17.5 | length 1288
  Top w8: U17.5@869.74,1948.73 900,1948.73 911.23,1937.5 v1(950,1937.5) ; SW34.6@1300,2087 1369,2156 1369,2400 1344.5,2424.5 1271.5,2424.5 1240,2456 1240,2514.5 SW30.6@1300,2574.5
  Bottom w8: v1(950,1937.5) 1325,1937.5 1362.5,1975 1362.5,2024.5 SW34.6@1300,2087
N16062862: SW30.7 SW34.7 U16.5 | length 1176.8
  Top w8: v1(824,2136.23) U16.5@869.74,2136.23 ; SW34.7@1300,1987 1384.5,2071.5 1384.5,2451 1361,2474.5 SW30.7@1300,2474.5
  Bottom w8: v1(824,2136.23) 887.5,2136.23 1036.73,1987 SW34.7@1300,1987
N16063306: LED9.1 Q5.E | length 99.8
  Top w8: Q5.E@970.28,2487.4 1069.9,2487.4 LED9.1@1070,2487.5
N16063352: LED10.1 Q5.C R89.1 | length 184.7
  Top w8: R89.1@700,2455 LED10.1@775,2455 775,2450 Q5.C@879.72,2450
N16063546: LED7.1 Q4.E | length 87.3
  Top w8: Q4.E@982.78,2674.9 1069.9,2674.9 LED7.1@1070,2675
N16063582: LED8.1 Q4.C R87.1 | length 194.3
  Top w8: R87.1@700,2642.5 LED8.1@775,2642.5 780,2637.5 Q4.C@892.22,2637.5
N16063690: R94.2 SW34.8 | length 221.8
  Top w8: R94.2@1130,2012 1134,2008 1179,2008 SW34.8@1300,1887
N16063694: R92.2 SW34.5 | length 180.4
  Top w8: R92.2@1130,2162 1181,2162 1206,2187 SW34.5@1300,2187
N16071573: CB1.1 J2.1 U1.8 | length 212
  Top w8: 880,7296 886.63,7289.37 U1.8@895.47,7289.37
  Top w40: J2.1@787.5,7387.5 805,7370 CB1.1@880,7370 ; 880,7296 CB1.1@880,7370 ; CB1.1@900,7370 CB1.1@880,7370
N16071783: R79.1 X2.3 | length 97.3
  Top w8: R79.1@3045,3175 3045,3244.49 X2.3@3072.83,3244.49
N16071803: C33.1 R79.2 R80.2 | length 140
  Top w8: R79.2@3105,3175 R80.2@3170,3175 C33.1@3170,3100
N16071977: C1.1 CON2.1 J3.1 | length 384.8
  Top w8: CON2.1@558.56,6987.5 603.5,6987.5 616,7000 616,7072 626.5,7082.5 C1.1@662.5,7082.5 709.5,7082.5 721,7071 721,7029 J3.1@787.5,6962.5
N16072061: LED1.2 U1.4 | length 84.3
  Top w12: U1.4@954.53,7210.63 1034.37,7210.63 LED1.2@1037.5,7207.5
N16072077: R1.2 U1.7 | length 125.8
  Top w12: U1.7@915.16,7289.37 915.16,7325 927.66,7337.5 962.5,7337.5 975,7350 R1.2@975,7370
N16072151: R2.2 R3.1 U1.5 | length 236.5
  Top w12: U1.5@954.53,7289.37 954.53,7300 967.03,7312.5 1037.5,7312.5 1050,7325 R2.2@1050,7370 R3.1@1125,7370
N16073800: R86.1 U15.215 | length 343.8
  Top w8: R86.1@3342.5,2662.5 v1(3342.5,2700) ; v1(3464.07,2650) 3464.07,2687.5 3500,2723.43 U15.215@3575.69,2723.43
  Bottom w8: v1(3342.5,2700) 3392.5,2650 v1(3464.07,2650)
N16073966: R85.1 U15.209 | length 246
  Top w8: R85.1@3342.5,2825 3352,2815.5 3352,2809.91 3475,2809.91 3483,2817.91 U15.209@3575.69,2817.91
N16074218: C67.2 U15.65 | length 126.9
  Top w8: v1(4528,2865.16) U15.65@4599.31,2865.16
  Bottom w30: C67.2@4576,2865.16 4579.84,2865.16 C67.2@4582.5,2862.5
  Bottom w40: v1(4528,2865.16) C67.2@4576,2865.16
N16075968: C2.2 CT5.1 CT7.1 L1.2 R10.2 SW9.1 | length 646.2
  Top w40: R10.2@1230,6675 C2.2@1230,6750 1355,6750 1380,6725 CT7.1@1380,6675 CT7.1@1380,6663.84 ; L1.2@1362.5,6572.24 1365.26,6575 1380,6575 CT7.1@1380,6663.84 ; CT5.1@1437.5,6720 1437.5,6663.84 ; SW9.1@1500,6575 1500,6625 1461.16,6663.84 1437.5,6663.84 ; CT7.1@1380,6663.84 1437.5,6663.84
N16075996: C7.2 C9.1 R21.2 R22.1 U8.5 | length 327.4
  Top w20: C9.1@1175,6342.5 R21.2@1250,6342.5 1250,6350 C7.2@1320,6350 R22.1@1320,6275 1320,6182.53 U8.5@1312.6,6182.53
N16076048: C2.1 C4.2 R9.2 R10.1 U3.5 | length 342.6
  Top w20: R9.2@1012.5,6755 C4.2@1087.5,6755 1165,6755 C2.1@1170,6750 R10.1@1170,6675 1162.6,6667.6 U3.5@1162.6,6570.03
N16076130: L1.1 U3.3 | length 126
  Top w8: U3.3@1237.4,6479.97 1254,6479.97
  Top w40: 1254,6479.97 1360.29,6479.97 L1.1@1362.5,6477.76
N16076160: C7.1 CT13.1 CT14.1 L4.2 R22.2 SW12.1 | length 684.9
  Top w40: R22.2@1380,6275 C7.1@1380,6350 CT13.1@1475,6350 ; CT13.1@1475,6357.5 CT13.1@1475,6350 ; L4.2@1525,6184.74 1484.74,6225 1475,6225 1475,6325 ; SW12.1@1662.5,6175 CT14.1@1662.5,6275 ; CT14.1@1670,6275 CT14.1@1662.5,6275 ; 1475,6325 CT13.1@1475,6350 ; 1475,6325 1525,6275 CT14.1@1662.5,6275
N16076656: BT1.2 D2.1 | length 1302.1
  Top w8: BT1.2@2789.3,5650.5 2871.8,5568 3960,5568 3995.5,5603.5 D2.1@3995.5,5650.5
N16076674: C3.2 C5.1 R11.2 R12.1 U4.5 | length 357.4
  Top w20: C5.1@1787.5,6730 R11.2@1862.5,6730 1862.5,6737.5 1920,6737.5 C3.2@1945,6712.5 R12.1@1945,6637.5 1950.1,6632.4 U4.5@1950.1,6532.53
N16076678: C10.1 R23.2 U4.1 | length 175
  Top w20: R23.2@1875,6342.5 C10.1@1950,6342.5 1950.1,6342.6 U4.1@1950.1,6442.47
N16076738: C3.1 CT6.1 CT8.1 L2.2 R12.2 SW10.1 | length 625.1
  Top w40: R12.2@2005,6637.5 2005,6675 2012.5,6682.5 2012.5,6686.25 ; C3.1@2005,6712.5 2005,6686.25 2012.5,6686.25 ; CT6.1@2125,6670 CT8.1@2212.5,6670 2300,6582.5 SW10.1@2300,6537.5 ; L2.2@2165.26,6537.5 L2.2@2162.5,6534.74 2124.77,6572.48 2124.77,6686.25 2012.5,6686.25
N16076802: CB7.1 D2.2 SW16.3 | length 205.9
  Top w8: D2.2@3995.5,5717.5 CB7.1@4058.43,5717.5 ; CB7.1@4062.5,5717.5 CB7.1@4058.43,5717.5 ; SW16.3@4195.5,5713 4062.93,5713 CB7.1@4058.43,5717.5
N16077186: C13.1 R20.1 U8.1 | length 394
  Top w20: R20.1@1100,6282.5 1100,6129 1136.53,6092.47 C13.1@1225.03,6092.47 ; C13.1@1212.5,6095 C13.1@1225.03,6092.47 ; U8.1@1312.6,6092.47 C13.1@1225.03,6092.47
N16077540: L4.1 U8.3 | length 138.5
  Top w8: U8.3@1387.4,6092.47 1406,6092.47 1408.21,6090.26
  Top w40: 1408.21,6090.26 L4.1@1525,6090.26
N16077552: L2.1 U4.3 | length 138.5
  Top w8: U4.3@2024.9,6442.47 2038,6442.47
  Top w40: 2038,6442.47 2040.21,6440.26 L2.1@2162.5,6440.26
N16088274: Q3.G R27.1 R31.2 | length 171.5
  Top w8: R27.1@6005,6275 6005,6202.68 Q3.G@6012.4,6195.28 6097.22,6195.28 R31.2@6100,6192.5
N16088560: RN4.1 SW3.6 | length 159.1
  Bottom w8: SW3.6@7487.5,6937.5 7542,6992 RN4.1@7624,6992
N16088582: RN6.3 SW7.6 | length 672.6
  Bottom w8: SW7.6@7487.5,6300 7595.5,6408 7960,6408 8014,6354 RN6.3@8014,6275
N16088594: RN6.1 SW7.7 | length 680
  Bottom w8: SW7.7@7487.5,6400 7560,6400 7584,6424 7982,6424 8046,6360 RN6.1@8046,6275
N16088636: RN5.1 SW13.8 | length 806
  Bottom w8: SW13.8@7487.5,5900 7600,6012.5 7600,6336 7624,6360 7816,6360 7846,6330 RN5.1@7846,6275
N16089230: RN2.1 SW3.10 | length 830.5
  Bottom w8: SW3.10@7487.5,7337.5 7976,7337.5 8064,7249.5 RN2.1@8064,7032
N16089234: RN2.3 SW3.9 | length 712.5
  Bottom w8: SW3.9@7487.5,7237.5 7968,7237.5 8032,7173.5 RN2.3@8032,7032
N16089238: RN2.5 SW3.8 | length 594.6
  Bottom w8: SW3.8@7487.5,7137.5 7960,7137.5 8000,7097.5 RN2.5@8000,7032
N16089246: RN2.7 SW3.7 | length 579.2
  Bottom w8: SW3.7@7487.5,7037.5 7570,7120 7928,7120 7968,7080 RN2.7@7968,7032
N16089266: C12.1 CON4.5 R28.1 | length 251.7
  Top w10: CON4.5@6264.47,6496.16 6264.47,6330 C12.1@6275,6330 R28.1@6350,6330
N16089318: RN4.3 SW7.10 | length 349.3
  Bottom w8: SW7.10@7487.5,6700 7545,6757.5 7545,6937 7568,6960 RN4.3@7624,6960
N16089326: RN4.5 SW7.9 | length 408
  Bottom w8: SW7.9@7487.5,6600 7560,6672.5 7560,6904 7584,6928 RN4.5@7624,6928
N16089330: RN4.7 SW7.8 | length 471.3
  Bottom w8: SW7.8@7487.5,6500 7576,6588.5 7576,6880 7592,6896 RN4.7@7624,6896
N16089414: RN6.5 SW13.10 | length 806
  Bottom w8: SW13.10@7487.5,6100 7568,6180.5 7568,6352 7608,6392 7936,6392 7982,6346 RN6.5@7982,6275
N16089418: RN6.7 SW13.9 | length 842
  Bottom w8: SW13.9@7487.5,6000 7584,6096.5 7584,6344 7616,6376 7912,6376 7950,6338 RN6.7@7950,6275
N16089662: RN5.3 SW13.7 | length 842
  Bottom w8: SW13.7@7487.5,5800 7616,5928.5 7616,6328 7632,6344 7792,6344 7814,6322 RN5.3@7814,6275
N16089708: CON4.6 LED6.2 | length 175.1
  Top w8: CON4.6@6166.04,6496.16 6166.04,6330 LED6.2@6175,6330
N16089718: RN5.5 SW13.6 | length 873.3
  Bottom w8: SW13.6@7487.5,5700 7632,5844.5 7632,6312 7648,6328 7768,6328 7782,6314 RN5.5@7782,6275
N16090054: CON7.1 R39.1 | length 142.9
  Top w8: CON7.1@7837.5,5687.5 7837.5,5759 7862.5,5784 R39.1@7862.5,5820
N16090066: CON7.2 R37.1 | length 143.3
  Top w8: R37.1@7712.5,5820 7712,5819.5 7712,5777.5 7737.5,5752 CON7.2@7737.5,5687.5
N16091004: LED6.1 R32.2 | length 77.5
  Top w8: R32.2@6175,6192.5 LED6.1@6175,6270
N16113780: R35.2 U7.3 | length 255.8
  Top w8: U7.3@8947.5,6248.5 8947.5,6189.5 8971.5,6165.5 9017,6165.5 9057,6125.5 9057,6069 R35.2@9060,6066
N16139982: PAD3.\ U9.38 | length 281.8
  Top w8: U9.38@7896.85,6792.62 7896.85,6856 7886.25,6866.6 7886.25,6966.25 7920,7000 PAD3.\@7920,7056
N16142981: RX1.1 RX2.2 UX1.4 | length 171.8
  Top w8: RX2.2@3870.5,5980.5 RX1.1@3937.7,5980.5 ; UX1.4@3937.7,6077.26 RX1.1@3937.7,5980.5 ; RX1.1@3945.5,5980.5 RX1.1@3937.7,5980.5
N16143119: CX1.1 D1.1 RX1.2 UX1.5 | length 300.7
  Top w8: RX1.2@3945.5,5920.5 3968.5,5920.5 4024,5976 4045.5,5976 CX1.1@4046,5976.5 ; UX1.5@4012.5,6077.26 4012.5,6048 4046,6014.5 CX1.1@4046,5976.5 ; D1.1@4108,5975.5 4047,5975.5 CX1.1@4046,5976.5
N16151191: D1.2 SW16.1 | length 92
  Top w8: D1.2@4108,5908.5 4108,5913 SW16.1@4195.5,5913
N16774332: C17.2 M1.1 R46.1 | length 282.5
  Top w8: C17.2@1630,5637.5 C17.2@1630,5650 ; R46.1@1630,5712.5 C17.2@1630,5650 ; M1.1@1837.5,5650 C17.2@1630,5650
N16774348: C15.2 M1.2 R36.2 | length 299.3
  Top w8: R36.2@1630,5862.5 C15.2@1630,5787.5 1631.5,5789 1798.5,5789 M1.2@1837.5,5750
N16774352: C19.2 M2.1 R48.1 | length 195
  Top w8: R48.1@1630,5537.5 C19.2@1630,5462.5 M2.1@1750,5462.5
N16774372: C25.1 C27.2 CON11.4 L9.2 | length 508.1
  Top w40: CON11.4@393.7,5167.03 393.7,5141 416,5141 537,5020 C25.1@675,5020 ; C27.2@675,4955 C25.1@675,5020 ; L9.2@757.5,5012.5 750,5020 C25.1@675,5020
N16774376: CON11.7 R51.1 R52.1 | length 230.2
  Top w8: CON11.7@192.91,5167.03 192.91,5314.59 R51.1@187.5,5320 R52.1@262.5,5320
N16774412: C22.2 C25.2 CON11.3 L8.2 | length 842.4
  Top w40: CON11.3@387.8,4895.37 v2(387.8,4805) v1(432,4805) ; v2(584,5077) v2(624,5077) 672,5077 C25.2@675,5080 ; C22.2@675,5145 C25.2@675,5080 ; L8.2@757.5,5075 752.5,5080 C25.2@675,5080
  Bottom w40: v2(387.8,4805) v1(432,4805) 512,4805 584,4877 v2(584,5077) v2(624,5077)
N16774440: C26.1 L9.1 | length 77.5
  Top w40: L9.1@817.5,5012.5 882.5,5012.5 C26.1@882.5,5000
N16774444: C24.1 L8.1 | length 65
  Top w40: L8.1@817.5,5075 C24.1@882.5,5075
N16774476: C24.2 R60.2 | length 65
  Top w40: C24.2@942.5,5075 R60.2@1007.5,5075
N16774486: C26.2 R61.2 | length 65
  Top w40: C26.2@942.5,5000 R61.2@1007.5,5000
N16774666: CON11.1 L10.2 | length 161.6
  Top w40: CON11.1@157.48,4895.37 157.48,4765 167.5,4765 L10.2@182.5,4750
N16774992: CT23.2 J8.2 L6.2 | length 169.3
  Top w8: J8.2@337.5,5850 337.5,5757.5 CT23.2@338.75,5756.25 L6.2@338.75,5681.25
N16775352: CT21.2 J7.2 L5.2 | length 184.5
  Top w8: J7.2@337.5,6125 337.5,6017.25 CT21.2@338.75,6016 ; L5.2@338.75,5950 CT21.2@338.75,6016 ; CT21.2@338.75,6025 CT21.2@338.75,6016
N16775426: J6.2 L3.2 | length 88
  Top w8: J6.2@337.5,6387.5 337.5,6301.25 L3.2@338.75,6300
N16775606: R45.1 SW15.3 | length 739.9
  Top w8: R45.1@1462.5,5855 1462.5,5885 1486.5,5909 1778.5,5909 SW15.3@2050,5637.5
N16775610: R41.1 SW15.2 | length 1085.7
  Top w8: R41.1@1087.5,5855 1104,5871.5 v1(1104,5888)
  Bottom w8: v1(1104,5888) 1104,5824 1128,5800 1987.5,5800 SW15.2@2050,5737.5
N16775614: R42.1 SW15.1 | length 992
  Top w8: R42.1@1162.5,5855 v1(1162.5,5888)
  Bottom w8: v1(1162.5,5888) 1162.5,5832 1178.5,5816 2028.5,5816 SW15.1@2050,5837.5
N16775704: C16.1 CON6.1 | length 120
  Top w8: CON6.1@712.5,5650 C16.1@832.5,5650
N16775904: R58.1 U10.32 | length 244.3
  Top w8: U10.32@1318.9,5410.14 1318.9,5382.1 1413,5288 1412.5,5287.5 R58.1@1412.5,5205
N16776180: C21.2 M2.2 R55.1 | length 195
  Top w8: R55.1@1630,5287.5 C21.2@1630,5362.5 M2.2@1750,5362.5
N16776184: CB34.2 CON31.1 CT97.2 Q7.D R95.1 R121.1 R123.1 | length 1652.7
  Top w8: R95.1@558,1856 606,1856 647.5,1814.5 v1(647.5,1150) 647.5,1070 695,1022.5 CON31.1@695,749.09
  Bottom w8: R121.1@555,975 R123.1@555,887.5 Q7.D@654.72,887.5 657.5,890.28 CT97.2@657.5,1000 CB34.2@657.5,1075 647.5,1075 v1(647.5,1150)
N16776342: CB35.2 Q7.G R122.2 | length 190.5
  Bottom w8: Q7.G@745.28,924.9 792.5,924.9 812.4,905 CB35.2@850,905 R122.2@850,982.5
N16776648: C18.1 CON9.1 R47.2 | length 267.9
  Top w8: CON9.1@712.5,5412.5 712.5,5475 737.5,5500 C18.1@832.5,5500 R47.2@832.5,5575
N16776656: C20.1 CON9.2 R53.2 | length 210.5
  Top w8: CON9.2@712.5,5312.5 750,5350 R53.2@832.5,5350 C20.1@832.5,5425
N16776660: C14.1 CON6.2 | length 132.5
  Top w8: CON6.2@712.5,5750 832.5,5750 C14.1@832.5,5737.5
N16777927: R63.2 U13.10 | length 225
  Top w40: U13.10@984.5,4362.5 1040,4362.5 1056,4378.5 1056,4524 R63.2@1055,4525
N16777929: C28.1 C63.1 R63.1 R105.1 R106.1 R107.1 | length 755.7
  Top w40: C28.1@862.5,4475 912.5,4525 R63.1@995,4525
  Bottom w40: C63.1@832.5,4337.5 C63.1@827.5,4337.5 ; C28.1@862.5,4475 827.5,4440 C63.1@827.5,4337.5 ; R107.1@987.5,4180 784,4180 755,4209 R106.1@755,4262.5 R105.1@755,4337.5 C63.1@827.5,4337.5
N16777958: R107.2 U13.15 | length 143.1
  Top w40: U13.15@984.5,4112.5 v1(1056,4112.5)
  Bottom w40: R107.2@987.5,4120 995,4112.5 v1(1056,4112.5)
N16777963: CON18.7 CON18.8 R105.2 | length 432.7
  Bottom w40: CON18.7@312.5,4375.39 352,4414.89 381.92,4414.89 CON18.8@382.58,4415.55 488,4415.55 567.55,4336 693.5,4336 R105.2@695,4337.5
N16777971: CON18.4 CON18.5 R106.2 | length 402.3
  Bottom w40: CON18.4@382.58,4254.92 687.42,4254.92 R106.2@695,4262.5
  Bottom w49: CON18.5@312.5,4295.08 328,4295.08 367.08,4256 381.5,4256 CON18.4@382.58,4254.92
N16778019: RN8.3 SW31.9 | length 120.1
  Bottom w8: SW31.9@6650,2200 6698,2152 6749.5,2152 RN8.3@6750,2151.5
N16778021: RN8.5 SW31.8 | length 108.1
  Bottom w8: SW31.8@6650,2100 6692.5,2100 6712,2119.5 RN8.5@6750,2119.5
N16778023: RN8.7 SW31.7 | length 151.9
  Bottom w8: SW31.7@6650,2000 6704,2054 6704,2080 6712,2088 6749.5,2088 RN8.7@6750,2087.5
N16778025: RN8.1 SW31.10 | length 175.2
  Bottom w8: SW31.10@6650,2300 6712,2238 6712,2192 6720,2184 6749.5,2184 RN8.1@6750,2183.5
N16778027: R118.1 SW31.6 | length 107.5
  Bottom w8: SW31.6@6650,1900 R118.1@6757.5,1900
N16778033: R119.1 SW35.6 | length 95
  Bottom w8: SW35.6@6650,1300 R119.1@6745,1300
N16778049: RN9.1 SW35.10 | length 178
  Bottom w8: SW35.10@6650,1700 6736,1614 6736,1571.6 RN9.1@6750,1571
N16778051: RN9.3 SW35.9 | length 125
  Bottom w8: SW35.9@6650,1600 6710.4,1539.6 RN9.3@6750,1539
N16778053: RN9.5 SW35.8 | length 118.6
  Bottom w8: SW35.8@6650,1500 6712,1500 6720,1508 6757.6,1508 RN9.5@6750,1507
N16778055: RN9.7 SW35.7 | length 144.3
  Bottom w8: SW35.7@6650,1400 6728,1478 6755.6,1478 RN9.7@6750,1475
N16778059: CON18.10 R71.2 | length 126.2
  Top w8: CON18.10@571.95,4095.08 687.42,4095.08 R71.2@695,4087.5
N16778075: CON18.12 R62.2 | length 137.7
  Top w8: CON18.12@571.95,4545.08 700,4545.08 700,4542.5 R62.2@695,4537.5
N16778534: C65.1 C66.1 U13.2 | length 181
  Top w40: v2(1256,4112.5) U13.2@1315.5,4112.5
  Bottom w40: v2(1256,4112.5) 1312.5,4112.5 ; C66.1@1312.5,4080 1312.5,4112.5 ; C65.1@1312.5,4145 1312.5,4112.5
N16778621: C62.1 C64.1 U13.7 | length 181
  Top w40: v2(1256,4362.5) U13.7@1315.5,4362.5
  Bottom w40: v2(1256,4362.5) 1312.5,4362.5 ; C64.1@1312.5,4342.5 1312.5,4362.5 ; C62.1@1312.5,4407.5 1312.5,4362.5
N16778666: R101.1 SW19.11 | length 95
  Bottom w8: R101.1@6692.5,4975 SW19.11@6787.5,4975
N16778667: R102.1 SW19.10 | length 95
  Bottom w8: R102.1@6692.5,4875 SW19.10@6787.5,4875
N16778730: LED4.1 R8.1 | length 65
  Top w8: LED4.1@1712.5,6730 R8.1@1712.5,6795
N16778750: Q2.B R17.1 | length 109.8
  Top w8: R17.1@1612.5,6370 1712.6,6370 Q2.B@1712.6,6379.72
N16778858: C30.1 R75.2 R78.2 | length 437.7
  Top w40: C30.1@1680,3775 1730,3775 R75.2@1750,3795 1752,3795 v2(1752,3736) ; R78.2@1962.5,3605 v2(1962.5,3662.5)
  Bottom w40: v2(1752,3736) 1887.5,3736 1961,3662.5 v2(1962.5,3662.5)
N16778886: R103.1 SW19.8 | length 95
  Bottom w8: R103.1@6692.5,4675 SW19.8@6787.5,4675
N16778888: R78.1 X1.3 | length 92.5
  Top w30: X1.3@1875,3537.7 1962.5,3540 R78.1@1962.5,3545
N16778904: R104.1 SW19.7 | length 95
  Bottom w8: R104.1@6692.5,4575 SW19.7@6787.5,4575
N16778996: LED3.1 R13.1 | length 75
  Top w8: LED3.1@2362.5,6732.5 2362.5,6662.5 R13.1@2367.5,6662.5
N16778997: R108.2 U14.25 | length 227.8
  Top w8: v1(1584,4190.5) 1624.71,4149.79 1624.71,4139.67 1659.76,4104.62 U14.25@1670.76,4104.62
  Bottom w8: R108.2@1529.5,4137 1529.5,4176 1544,4190.5 v1(1584,4190.5)
N16779018: Q1.B R14.1 | length 74.8
  Top w8: R14.1@2450,6717.5 2450.1,6717.6 Q1.B@2450.1,6792.22
N16781870: C11.1 CON3.5 R25.1 | length 250.7
  Top w10: CON3.5@4739.47,6496.16 4739.47,6400 4760,6379.47 4760,6332.5 C11.1@4762.5,6330 R25.1@4837.5,6330
N16781872: CON3.6 LED5.2 | length 180.2
  Top w8: CON3.6@4641.04,6496.16 4641.04,6416 4672,6385.04 4672,6333 LED5.2@4675,6330
N16781874: Q6.G R97.2 R98.1 | length 201.8
  Bottom w8: R97.2@4325,6882.5 4330,6887.5 R98.1@4425.1,6887.5 ; Q6.G@4425.1,6795.28 R98.1@4425.1,6887.5 ; R98.1@4432.5,6887.5 R98.1@4425.1,6887.5
N16782008: CON3.10 R97.1 | length 136.6
  Top w8: CON3.10@4325.89,6950.89 v1(4392,6950.89)
  Bottom w8: R97.1@4325,6942.5 4383.61,6942.5 v1(4392,6950.89)
N16782012: LED5.1 R24.2 | length 75
  Top w8: R24.2@4600,6270 LED5.1@4675,6270
N160722810: LED1.1 R5.1 | length 75
  Top w20: LED1.1@1037.5,7267.5 R5.1@1112.5,7267.5
N167787022: LED4.2 Q2.C | length 215.3
  Top w20: LED4.2@1712.5,6670 1712.5,6562.5 1750,6525 Q2.C@1750,6470.28
N167790142: LED3.2 Q1.C | length 202.7
  Top w8: LED3.2@2362.5,6792.5 2362.5,6861.28 2384,6882.78 Q1.C@2487.5,6882.78
N167791390: LED2.1 R7.1 | length 75
  Top w8: LED2.1@1325,6917.5 R7.1@1400,6917.5
N_ALE: RN6.4 U9.17 | length 198
  Top w8: U9.17@8014.96,5995.37 v1(8014.96,6136)
  Bottom w8: RN6.4@8014,6193 8014.96,6192.04 v1(8014.96,6136)
N_CLE: RN6.6 U9.16 | length 203.1
  Top w8: v1(7982,6112) 7995.28,6098.72 U9.16@7995.28,5995.37
  Bottom w8: v1(7982,6112) RN6.6@7982,6193
N_CS0: RN6.2 U9.9 | length 392.6
  Top w8: U9.9@7857.48,5995.37 7857.48,6088 7961.48,6192 v1(8080,6192)
  Bottom w8: RN6.2@8046,6193 8047,6192 v1(8080,6192)
N_CS1: R39.2 U9.10 | length 130
  Top w8: R39.2@7862.5,5880 7877.17,5880 U9.10@7877.17,5995.37
N_D0: RN2.2 U9.29 | length 311.6
  Top w8: U9.29@8074.02,6792.62 8074.02,6760 v1(8104,6730.02)
  Bottom w8: RN2.2@8064,6950 8064,6904 8104,6864 v1(8104,6730.02)
N_D1: RN2.4 U9.30 | length 317.1
  Top w8: v1(8054.33,6728) U9.30@8054.33,6792.62
  Bottom w8: RN2.4@8032,6950 8032,6904 8080,6856 8080,6753.67 v1(8054.33,6728)
N_D2: RN2.6 U9.31 | length 315.9
  Top w8: v1(8018.65,6736) 8034.65,6752 U9.31@8034.65,6792.62
  Bottom w8: RN2.6@8000,6950 8000,6896 8056,6840 8056,6773.35 v1(8018.65,6736)
N_D3: RN2.8 U9.32 | length 176.8
  Top w8: U9.32@8014.96,6792.62 v1(8014.96,6832)
  Bottom w8: RN2.8@7968,6950 7968,6878.96 v1(8014.96,6832)
N_D4: RN4.2 U9.41 | length 289
  Top w8: U9.41@7837.8,6792.62 v1(7837.8,6848)
  Bottom w8: RN4.2@7706,6992 7765.8,6992 7837.8,6920 v1(7837.8,6848)
N_D5: RN4.4 U9.42 | length 240.8
  Top w8: v1(7800,6842.11) 7818.11,6824 U9.42@7818.11,6792.62
  Bottom w8: RN4.4@7706,6960 7752,6960 7800,6912 v1(7800,6842.11)
N_D6: RN4.6 U9.43 | length 299.6
  Top w8: U9.43@7798.43,6792.62 7798.43,6752 v1(7808,6742.43)
  Bottom w8: RN4.6@7706,6928 7736,6928 7760,6904 7760,6790.43 v1(7808,6742.43)
N_D7: RN4.8 U9.44 | length 228.4
  Top w8: v1(7760,6749.26) 7778.74,6768 U9.44@7778.74,6792.62
  Bottom w8: RN4.8@7706,6896 7720,6896 7728,6888 7728,6781.26 v1(7760,6749.26)
N_R/B0: R38.1 RN5.4 U9.7 | length 329
  Top w8: R38.1@7787.5,5880 7787.5,5906.89 7818.11,5937.5 U9.7@7818.11,5995.37 v1(7818.11,6128)
  Bottom w8: RN5.4@7814,6193 7814,6136 7812.06,6134.06 v1(7818.11,6128)
N_R/B1: R37.2 U9.6 | length 173.9
  Top w8: R37.2@7712.5,5880 7712,5880.5 7712,5912 7728,5928 7766.43,5928 7798.43,5960 U9.6@7798.43,5995.37
N_RE: RN5.2 U9.8 | length 214.3
  Top w8: U9.8@7837.8,5995.37 7837.8,6111.8 v1(7862,6136)
  Bottom w8: RN5.2@7846,6193 7846,6152 v1(7862,6136)
N_WE: RN6.8 U9.18 | length 358.5
  Top w8: v1(7944,6128) 7984,6168 8032,6168 8048,6152 8048,6109.35 8034.65,6096 U9.18@8034.65,5995.37
  Bottom w8: v1(7944,6128) 7952,6136 7952,6191 RN6.8@7950,6193
N_WP: R40.1 RN5.6 U9.19 | length 646.4
  Top w8: R40.1@8050,5880 8054.33,5884.33 U9.19@8054.33,5995.37 8054.33,6040 v1(8070.33,6056)
  Bottom w8: RN5.6@7782,6193 7782,6050 7816,6016 8030.33,6016 v1(8070.33,6056)
NBE0: CON26.21 RB3.2 | length 4091.6
  Top w8: RB3.2@7342.5,3212.5 7360,3212.5 7392,3180.5 7392,1904 v2(7592,1704)
  Bottom w8: v2(7592,1704) 8696,1704 8880,1520 9907.5,1520 CON26.21@9962.5,1575
NBE1: CON26.22 RB4.2 | length 4256.4
  Top w8: RB4.2@7342.5,3287.5 7360,3287.5 7408,3239.5 7408,1928 v2(7720,1616)
  Bottom w8: v2(7720,1616) 8752,1616 8864,1504 9928,1504 9944.5,1520.5 10008,1520.5 CON26.22@10062.5,1575
NCS0: CON26.10 RB12.2 | length 453.2
  Top w8: RB12.2@9630,2225 10012.5,2225 CON26.10@10062.5,2175
NCS1: CON26.9 RB11.2 | length 342.9
  Top w8: RB11.2@9630,2150 9743,2150 9768,2175 CON26.9@9962.5,2175
NCS2: CON26.8 RB10.2 | length 473.9
  Top w8: RB10.2@9630,2375 9729,2375 9776,2328 10009.5,2328 CON26.8@10062.5,2275
NCS3: CON26.7 RB9.2 | length 342.9
  Top w8: RB9.2@9630,2300 9743,2300 9768,2275 CON26.7@9962.5,2275
NCS4: CON26.6 RB8.2 | length 494.6
  Top w8: RB8.2@9630,2525 9683,2525 9784,2424 10013.5,2424 CON26.6@10062.5,2375
NOE: CON26.4 RB6.2 | length 515.3
  Top w8: RB6.2@9630,2675 9661,2675 9808,2528 10009.5,2528 CON26.4@10062.5,2475
NRST: C6.2 J4.1 R15.2 SW4.1 U14.32 U15.143 | length 8041.2
  Top w8: v1(1624,3984) 1634.38,3994.38 U14.32@1670.76,3994.38 ; SW4.1@2384.84,6967.81 2384,6966.97 2422.97,6928 2536,6928 2696,6768 ; v1(2616,6256) 2616,6688 2696,6768 ; J4.1@2912.5,6975 2912.5,6933 2819.5,6840 2819.5,6766.5 R15.2@2819,6766 C6.2@2744,6766 2742,6768 2696,6768 ; v1(3080,4960) 3008,4960 2952,4904 2952,4560 2888,4496 2888,4440 2905.5,4422.5 2905.5,4182.5 3008,4080 v1(3096,4080) 3585.39,4080 3969.39,3696 U15.143@3969.39,3636.81
  Bottom w8: v1(1624,3984) 1624,4192 1360,4456 1360,4612.5 1387.5,4640 1984,4640 2088,4536 2088,4200 2250.5,4037.5 3053.5,4037.5 v1(3096,4080) ; v1(2616,6256) 2616,5408 3064,4960 v1(3080,4960)